# EAGLE board Lamp Logic Board_20 BRAIN (EAGLE 9.5.1)
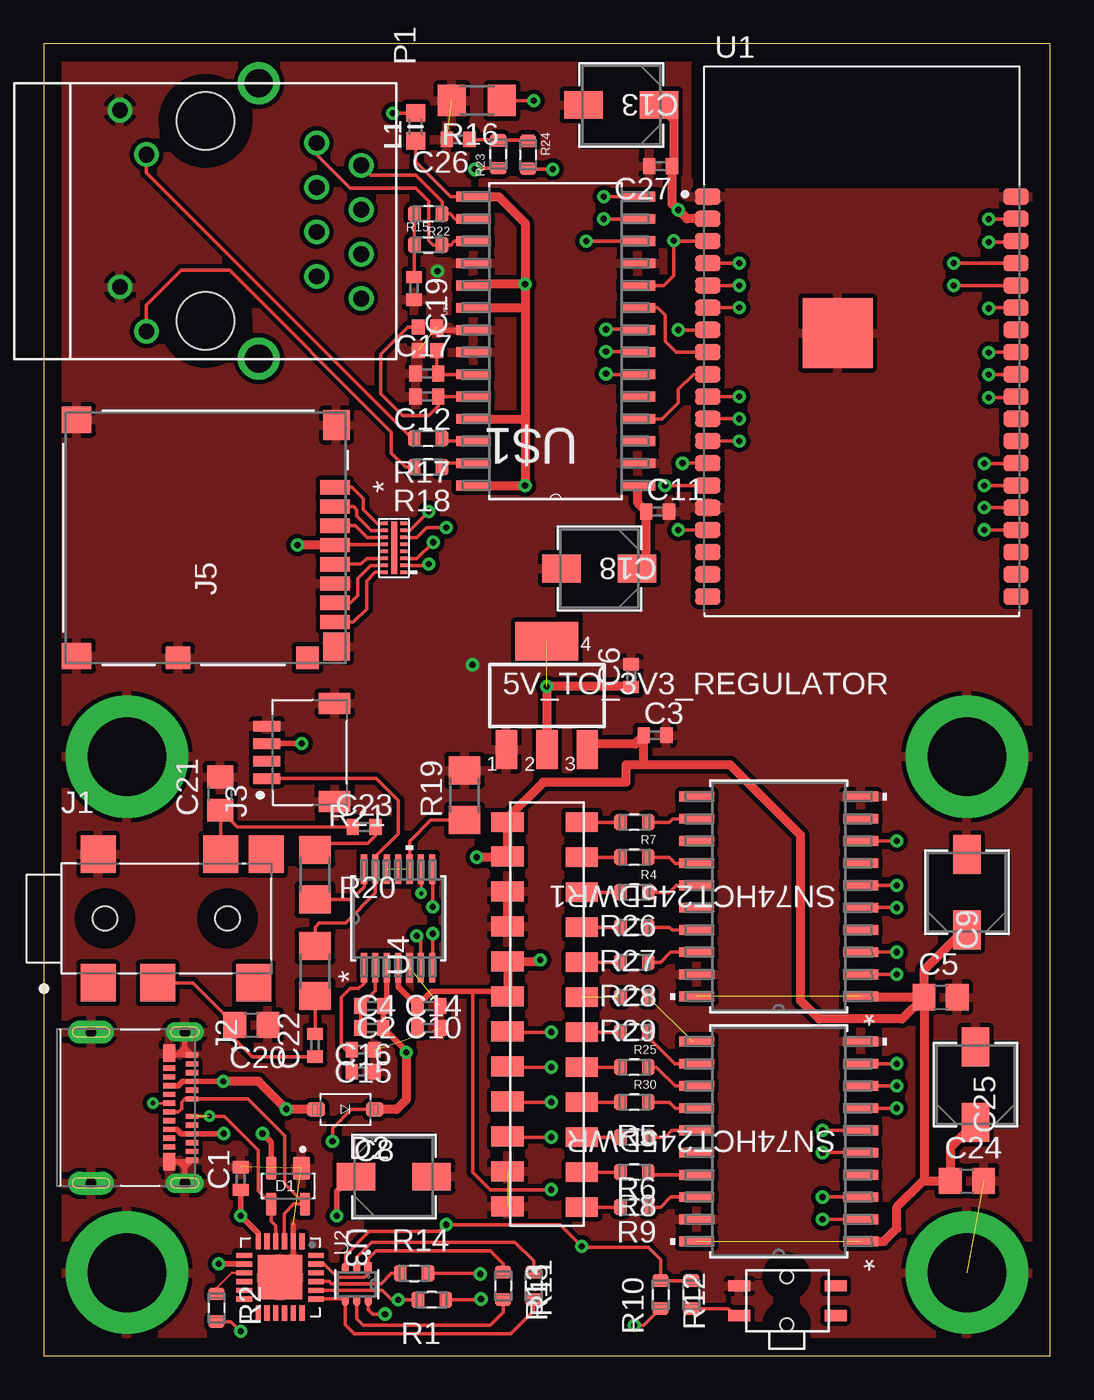
[diagram p0: board, top side]
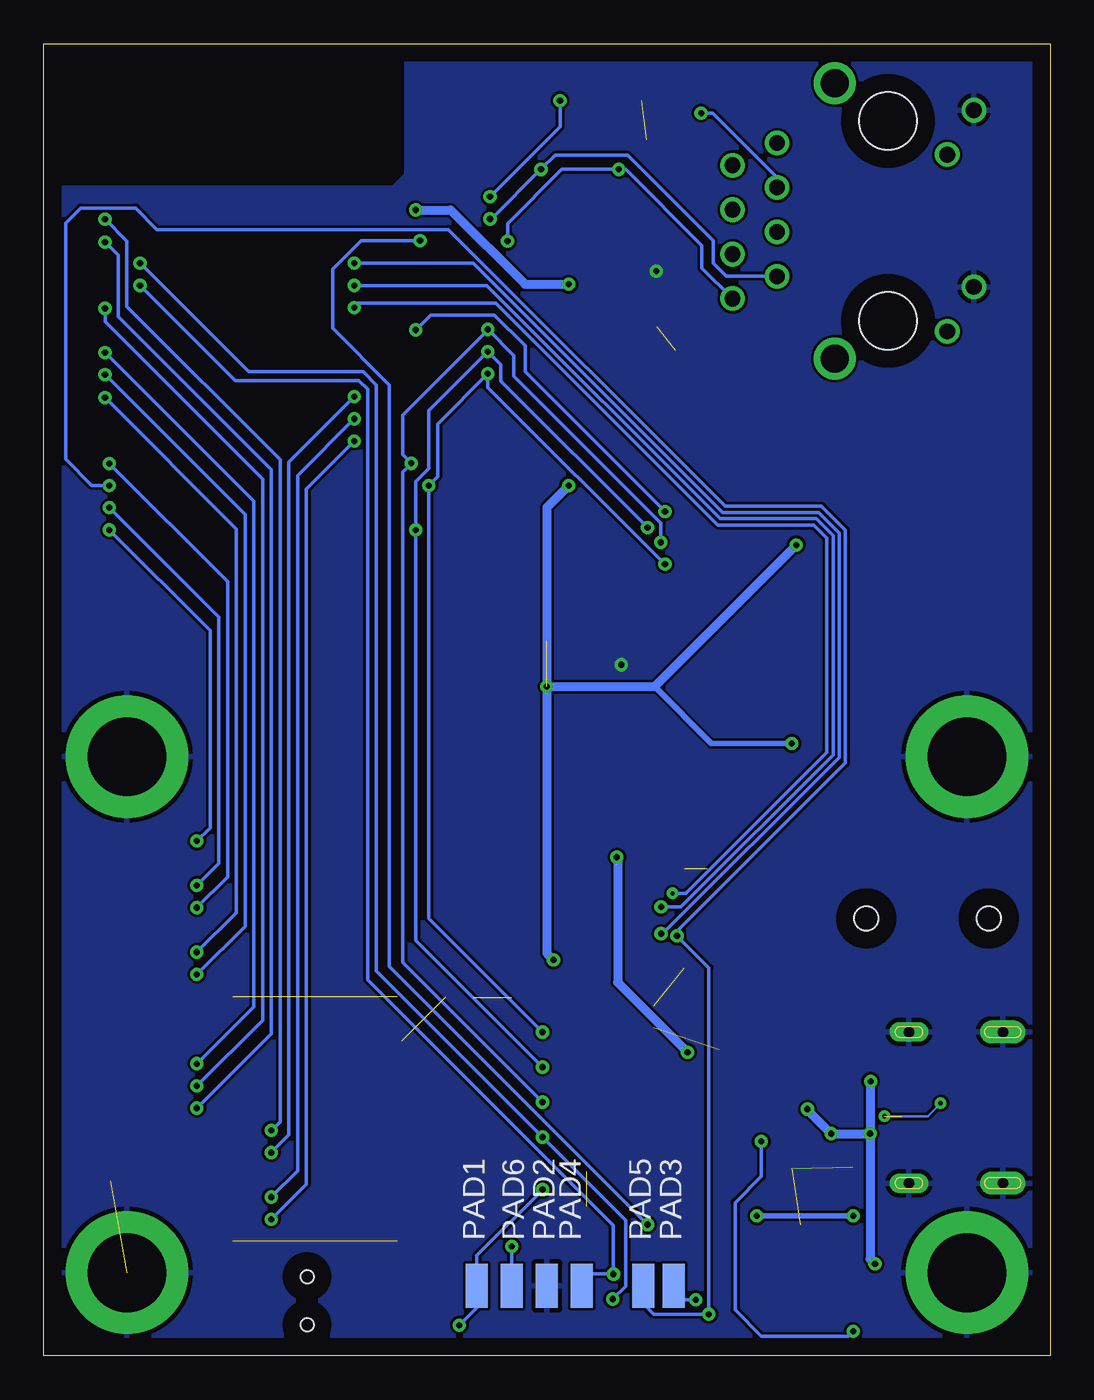
[diagram p1: board, bottom side, seen from below]

Size 57.5 x 75 mm. Coordinates in mm from the lower left corner, seen from the top.
Outline: 0,0 57.5,0 57.5,75 0,75 0,0
Copper layers (1*16): Top 0.035mm / dielectric 1.5mm / Bottom 0.035mm
Design rules "default": minimum track width 6mil, minimum drill 0.35mm, track to track 6mil, track to pad 6mil, pad to pad 6mil, via to via 6mil, smd to smd 6mil, copper to edge 40mil, drill to drill 6mil, minimum pad ring 10mil, minimum via ring 8mil, stop-mask expansion 4mil, vias tented up to drill 0mil, thermal gap 10mil

## Footprints (pad centres in the part's own frame; a part is rotated, then mirrored left to right if it is on the bottom)
SOT223 = smd 1.219 x 2.235: 1 -2.311,-3.099; 2 0,-3.099; 3 2.311,-3.099 | smd 3.6 x 2.2: 4 0,3.099
C0402 = smd 0.7 x 0.9: 1 -0.65,0; 2 0.65,0
C0805 = smd 1.3 x 1.5: 1 -0.95,0; 2 0.95,0
CAP_EEFC_B = smd 2.21 x 1.575: 1 -2.159,0; 2 2.159,0
SOT143 = smd 0.99 x 1.3: 1 -0.76,-1.025 | smd 0.59 x 1.3: 2 0.96,-1.025; 3 0.96,1.025; 4 -0.96,1.025
SOD-123 = smd 1.02 x 0.86: A 1.68,0; C -1.68,0
CUI_SJ2-35894D-SMT-TR = smd 2 x 2.15: 1 -3.9,-3.675; 2 3.1,3.675; 3 -0.5,-3.675; 4 -3.9,3.675; 10 5.7,3.675; 11 5,-3.675 | hole 1.4: -3.5,0; 3.5,0
MOLEX_105450-0101 = smd 0.3 x 0.7: A1 -3,3.77; A2 -2.5,3.77; A3 -2,3.77; A4 -1.5,3.77; A5 -1,3.77; A6 -0.5,3.77; A7 0.5,3.77; A8 1,3.77; A9 1.5,3.77; A10 2,3.77; A11 2.5,3.77; A12 3,3.77; B2 2.25,2.47; B3 1.75,2.47; B4 1.25,2.47; B5 0.75,2.47; B6 0.25,2.47; B7 -0.25,2.47; B8 -0.75,2.47; B9 -1.25,2.47; B10 -1.75,2.47; B11 -2.25,2.47 | smd 1 x 0.7: B1 3.1,2.47; B12 -3.1,2.47 | drill 0.6 pad 1.1 long: S1 -4.32,3.36; S2 4.32,3.36 | drill 0.6 pad 1.3 long: S3 -4.32,-2; S4 4.32,-2
JST_SM04B-SRSS-TB(LF)(SN) = smd 0.6 x 1.55: 1 -1.5,0; 2 -0.5,0; 3 0.5,0; 4 1.5,0 | smd 1.2 x 1.8: S1 -2.8,-3.875; S2 2.8,-3.875
CON00218_8 = smd 0.813 x 1.676: 1 2.899,-7.387; 2 1.799,-7.387; 3 0.699,-7.387; 4 -0.401,-7.387; 5 -1.501,-7.387; 6 -2.601,-7.387; 7 -3.701,-7.387; 8 -4.801,-7.387 | smd 1.499 x 1.702: 9 -6.751,7.374; 10 6.751,7.374 | smd 1.295 x 1.397: 11 -6.859,1.577 | smd 1.295 x 1.295: 12 -6.859,-5.823 | smd 1.6 x 1.499: 13 -6.201,-7.476 | smd 1.702 x 1.499: 14 6.449,-7.476
L0603 = smd 1 x 1.1: 1 -0.794,0; 2 0.794,0
WIZNET_RB1-125BAG1A = drill 0.9: L1 6.325,-3.38; L2 3.784,-4.899; L3 -3.786,-3.379; L4 -6.325,-4.9 | drill 0.9 pad 1.3: R1 -4.446,6.349; R2 -3.176,8.889; R3 -1.906,6.349; R4 -0.636,8.889; R5 0.634,6.349; R6 1.904,8.889; R7 3.174,6.349; R8 4.444,8.889 | drill 1.6 pad 2.184: S1 -7.876,3.049; S2 7.874,3.049 | hole 3.3: 5.714,-0.001; -5.716,-0.001
SMD1,27-2,54 = smd 1.27 x 2.54: 1 0,0
RES_0603 = smd 0.74 x 0.93: 1 -0.795,0; 2 0.795,0
R1206 = smd 1.6 x 1.803: 1 -1.422,0; 2 1.422,0
DW20 = smd 1.981 x 0.559: 1 -4.686,5.715; 2 -4.686,4.445; 3 -4.686,3.175; 4 -4.686,1.905; 5 -4.686,0.635; 6 -4.686,-0.635; 7 -4.686,-1.905; 8 -4.686,-3.175; 9 -4.686,-4.445; 10 -4.686,-5.715; 11 4.686,-5.715; 12 4.686,-4.445; 13 4.686,-3.175; 14 4.686,-1.905; 15 4.686,-0.635; 16 4.686,0.635; 17 4.686,1.905; 18 4.686,3.175; 19 4.686,4.445; 20 4.686,5.715
XCVR_ESP32-WROVER-I = smd 1.45 x 0.93: 1 -8.81,8.26; 2 -8.81,6.99; 3 -8.81,5.72; 4 -8.81,4.45; 5 -8.81,3.18; 6 -8.81,1.91; 7 -8.81,0.64; 8 -8.81,-0.63; 9 -8.81,-1.9; 10 -8.81,-3.17; 11 -8.81,-4.44; 12 -8.81,-5.71; 13 -8.81,-6.98; 14 -8.81,-8.25; 15 -8.81,-9.52; 16 -8.81,-10.79; 17 -8.81,-12.06; 18 -8.81,-13.33; 19 -8.81,-14.6; 20 8.81,-14.6; 21 8.81,-13.33; 22 8.81,-12.06; 23 8.81,-10.79; 24 8.81,-9.52; 25 8.81,-8.25; 26 8.81,-6.98; 27 8.81,-5.71; 28 8.81,-4.44; 29 8.81,-3.17; 30 8.81,-1.9; 31 8.81,-0.63; 32 8.81,0.64; 33 8.81,1.91; 34 8.81,3.18; 35 8.81,4.45; 36 8.81,5.72; 37 8.81,6.99; 38 8.81,8.26 | smd 4 x 4: 39 -1.38,0.47
SILABS_CP2102N-A02-GQFN24R = smd 0.9 x 0.3: 1 -1.55,1.75; 2 -1.55,1.25; 3 -1.55,0.75; 4 -1.55,0.25; 5 -1.55,-0.25; 6 -1.55,-0.75; 13 2.55,-0.75; 14 2.55,-0.25; 15 2.55,0.25; 16 2.55,0.75; 17 2.55,1.25; 18 2.55,1.75 | smd 0.3 x 0.9: 7 -0.75,-1.55; 8 -0.25,-1.55; 9 0.25,-1.55; 10 0.75,-1.55; 11 1.25,-1.55; 12 1.75,-1.55; 19 1.75,2.55; 20 1.25,2.55; 21 0.75,2.55; 22 0.25,2.55; 23 -0.25,2.55; 24 -0.75,2.55 | smd 2.55 x 2.55: 25 0.5,0.5
SOT-363 = smd 0.6 x 0.42: 1 -0.95,0.65; 2 -0.95,0; 3 -0.95,-0.65; 4 0.95,-0.65; 5 0.95,0; 6 0.95,0.65
PW14 = smd 1.676 x 0.356: 1 -2.819,1.95; 2 -2.819,1.3; 3 -2.819,0.65; 4 -2.819,0; 5 -2.819,-0.65; 6 -2.819,-1.3; 7 -2.819,-1.95; 8 2.819,-1.95; 9 2.819,-1.3; 10 2.819,-0.65; 11 2.819,0; 12 2.819,0.65; 13 2.819,1.3; 14 2.819,1.95
SOIC127P1034X264-28N = smd 1.981 x 0.559: 1 -4.699,8.255; 2 -4.699,6.985; 3 -4.699,5.715; 4 -4.699,4.445; 5 -4.699,3.175; 6 -4.699,1.905; 7 -4.699,0.635; 8 -4.699,-0.635; 9 -4.699,-1.905; 10 -4.699,-3.175; 11 -4.699,-4.445; 12 -4.699,-5.715; 13 -4.699,-6.985; 14 -4.699,-8.255; 15 4.699,-8.255; 16 4.699,-6.985; 17 4.699,-5.715; 18 4.699,-4.445; 19 4.699,-3.175; 20 4.699,-1.905; 21 4.699,-0.635; 22 4.699,0.635; 23 4.699,1.905; 24 4.699,3.175; 25 4.699,4.445; 26 4.699,5.715; 27 4.699,6.985; 28 4.699,8.255
CM1624-08DE = smd 0.2 x 0.4: CLK 1.075,1.3; CMD 2.275,1.3; DATA0 0.675,1.3; DATA1 0.3,1.3; DATA2 3.075,1.3; DATA3 2.675,1.3; ESD1 1.475,1.3; ESD2 1.475,0.175; ESD3 1.875,0.175; SDCLK 1.075,0.175; SDCMD 2.275,0.175; SDDATA0 0.675,0.175; SDDATA1 0.275,0.175; SDDATA2 3.075,0.175; SDDATA3 2.675,0.175; VCC 1.875,1.3 | smd 3 x 0.35: GND 1.7,0.725
ECS-250-10-37B-CTN-TR = smd 0.85 x 0.75: 1 0.45,0.4; 2 1.8,0.4; 3 1.8,1.45; 4 0.45,1.45
QUICKFIT_RISER_THING = drill 4.5 pad 7: P$1 0,0
TL1014BF160QG = smd 1.27 x 0.635: P$1 0,0; P$2 5.5,0; P$3 0,-1.7; P$4 5.5,-1.7 | hole 0.75: 2.7,0.525; 2.7,-2.225
MY_HEADER = smd 1.12 x 1.83: P$1 -2,0; P$2 0.005,0; P$3 2.005,0; P$4 4.005,0; P$5 6.005,0; P$6 8.005,0; P$7 10.005,0; P$8 12.005,0; P$9 14.005,0; P$10 16.005,0; P$11 18.005,0; P$12 20.005,0; P$13 -2,-4.25; P$14 -0.045,-4.25; P$15 1.955,-4.25; P$16 3.955,-4.25; P$17 5.955,-4.25; P$18 7.955,-4.25; P$19 9.955,-4.25; P$20 11.955,-4.25; P$21 13.955,-4.25; P$22 15.955,-4.25; P$23 17.955,-4.25; P$24 19.955,-4.25

## Placement (x,y rotation side)
5V_TO_3V3_REGULATOR  [SOT223]  28.75,37.75 0 top
C1  0.1uF  [C0402]  11.26,10.14 90 top
C2  1uF  [C0402]  18.75,18.75 0 top
C3  1uF  [C0402]  34.93,35.47 0 top
C4  0.1uF  [C0402]  18.75,20 0 top
C5  0.1uF  [C0805]  51.25,20.5 0 top
C6  1uF  [C0402]  33.56,38.88 90 top
C8  1uF  [CAP_EEFC_B]  20,10.25 0 top
C9  1uF  [CAP_EEFC_B]  52.75,26.5 90 top
C10  1uF  [C0402]  22,18.75 0 top
C11  10uF  [C0402]  35.08,48.26 0 top
C12  6pF  [C0402]  21.9,54.83 180 top
C13  100uF  [CAP_EEFC_B]  33,71.5 180 top
C14  0.1uF  [C0402]  22,20 0 top
C15  1uF  [C0402]  18.25,16.25 180 top
C16  0.1uF  [C0402]  18.25,17.5 180 top
C17  6pF  [C0402]  21.89,56.14 180 top
C18  100uF  [CAP_EEFC_B]  31.75,45 180 top
C19  0.1uF  [C0402]  21.16,61.01 270 top
C20  0.1uF  [C0805]  11.86,18.92 0 top
C21  0.1uF  [C0805]  10.09,32.14 90 top
C22  1uF  [C0402]  15.5,17.75 90 top
C23  1uF  [C0402]  18.3,30.22 0 top
C24  0.1uF  [C0805]  52.75,10 0 top
C25  1uF  [CAP_EEFC_B]  53.25,15.5 90 top
C26  0.1uF  [C0402]  23.68,69.53 180 top
C27  1uF  [C0402]  35.25,68 180 top
D1  SP0503BAHTG  [SOT143]  13.97,9.7 180 top
D2  MBR0520LT1G  [SOD-123]  17.24,14.08 180 top
J1  SJ2-35894D-SMT-TR  [CUI_SJ2-35894D-SMT-TR]  7,25 0 top
J2  105450-0101  [MOLEX_105450-0101]  4.7,14.19 270 top
J3  SM04B-SRSS-TB(LF)(SN)  [JST_SM04B-SRSS-TB(LF)(SN)]  12.75,34.5 90 top
J5  LLC  [CON00218_8]  9.25,46.75 90 top
L1  EXC3BP  [L0603]  21.25,70.25 90 top
P1  RB1-125BAG1A  [WIZNET_RB1-125BAG1A]  9.25,64.88 270 top
PAD1  VCC  [SMD1,27-2,54]  32.75,4 0 bottom
PAD2  GND  [SMD1,27-2,54]  28.75,4 0 bottom
PAD3  TX  [SMD1,27-2,54]  21.5,4 0 bottom
PAD4  RX  [SMD1,27-2,54]  26.75,4 0 bottom
PAD5  DTR  [SMD1,27-2,54]  23.25,4 0 bottom
PAD6  RTS  [SMD1,27-2,54]  30.75,4 0 bottom
R1  330  [RES_0603]  22.18,3.2 180 top
R2  12k  [RES_0603]  9.88,2.75 270 top
R4  330  [RES_0603]  33.75,28.5 180 top
R5  330  [RES_0603]  33.75,14.5 180 top
R6  330  [RES_0603]  33.75,12.5 180 top
R7  330  [RES_0603]  33.75,30.5 180 top
R8  330  [RES_0603]  33.75,10.5 180 top
R9  330  [RES_0603]  33.75,8.5 180 top
R10  330  [RES_0603]  37,3.5 270 top
R11  12k  [RES_0603]  28,4 270 top
R12  12k  [RES_0603]  35.25,3.5 270 top
R13  12k  [RES_0603]  26.25,4 270 top
R14  330  [RES_0603]  21.16,4.72 0 top
R15  330  [RES_0603]  21.97,63.5 0 top
R16  2.32k  [R1206]  24.75,71.75 180 top
R17  330  [RES_0603]  21.96,52.44 180 top
R18  330  [RES_0603]  21.97,50.8 180 top
R19  10k  [R1206]  24.04,32.05 90 top
R20  75  [R1206]  15.5,22 90 top
R21  75  [R1206]  15.5,27.5 270 top
R22  330  [RES_0603]  21.97,65.28 180 top
R23  330  [RES_0603]  25.98,68.68 90 top
R24  330  [RES_0603]  27.68,68.65 270 top
R25  330  [RES_0603]  33.75,18.5 180 top
R26  330  [RES_0603]  33.75,26.5 180 top
R27  330  [RES_0603]  33.75,24.5 180 top
R28  330  [RES_0603]  33.75,22.5 180 top
R29  330  [RES_0603]  33.75,20.5 180 top
R30  330  [RES_0603]  33.75,16.5 180 top
SN74HCT245DWR  SN74HCT245DWR  [DW20]  42,12.25 180 top
SN74HCT245DWR1  SN74HCT245DWR  [DW20]  42,26.25 180 top
U1  ESP32-WROVER-IB  [XCVR_ESP32-WROVER-I]  46.75,58 0 top
U2  CP2102N-A02-GQFN24R  [SILABS_CP2102N-A02-GQFN24R]  13,5 270 top
U3  MMDT3904-7-F  [SOT-363]  17.88,4.09 270 top
U4  PCM1808PWR  [PW14]  20.25,25 90 top
U$1  ENC28J60/SO  [SOIC127P1034X264-28N]  29.25,58 180 top
U$2  CM1624-08DE  [CM1624-08DE]  20.75,44.5 90 top
U$3  ECS-250-10-37B-CTN-TR  [ECS-250-10-37B-CTN-TR]  21,59.25 270 top
U$4  QUICKFIT_RISER_THING  [QUICKFIT_RISER_THING]  4.75,4.75 0 top
U$5  QUICKFIT_RISER_THING  [QUICKFIT_RISER_THING]  4.75,34.25 0 top
U$6  QUICKFIT_RISER_THING  [QUICKFIT_RISER_THING]  52.75,34.25 0 top
U$7  TL1014BF160QG  [TL1014BF160QG]  39.75,4 0 top
U$8  QUICKFIT_RISER_THING  [QUICKFIT_RISER_THING]  52.75,4.75 0 top
U$9  MY_HEADER  [MY_HEADER]  30.75,28.5 270 top

## Library data of the parts
5V_TO_3V3_REGULATOR = lm1117; MF: Texas Instruments; MPN: LM1117MP-1.8; OC_FARNELL: 1469053; OC_NEWARK: 41K3467
C1-C6 C10-C12 C14-C17 C19-C24 C26 C27 R16 R19-R21 = resistor
C8 C9 C13 C18 C25 = EEE-FC1V1R0R; MANUFACTURER_PART_NUMBER: EEEFC1V1R0R; VENDOR: Panasonic
D1 = SP0503BAHTG; DESCRIPTION: SP050xBA Series 8 V 30 pF Uni-Directional SMT TVS Avalanche Diode Array SOT-143; DIGI-KEY_PART_NUMBER: F2715CT-ND; DIGI-KEY_PURCHASE_URL: https://www.digikey.com/product-detail/en/littelfuse-inc/SP0503BAHTG/F2715CT-ND/1154322?utm_source=snapeda&utm_medium=aggregator&utm_campaign=symbol; MF: Littelfuse Inc.; MP: SP0503BAHTG; PACKAGE: SOT-143 Littelfuse
D2 = Diodes; CREATED_BY: PCBLayout.com; DIGIKEY_PART_NUMBER: MBR0520LT1GOSTR-ND; MANUFACTURER: ON Semiconductor; MPN: MBR0520LT1G; PACKAGE: SOD-123
J1 = SJ2-35894D-SMT-TR; CUI_PURCHASE_URL: https://www.cui.com/product/interconnect/connectors/audio-connectors/jacks/sj2-3589x-smt-series?utm_source=snapeda.com&utm_medium=referral&utm_campaign=snapedaBOM; DESCRIPTION: 3.5 mm, Stereo, Right Angle, Surface Mount _SMT_, Audio Jack Connector; DIGI-KEY_PART_NUMBER: CP-SJ2-35894D-SMT-CT-ND; DIGI-KEY_PURCHASE_URL: https://www.digikey.com/product-detail/en/cui-inc/SJ2-35894D-SMT-TR/CP-SJ2-35894D-SMT-CT-ND/6619623?utm_source=snapeda&utm_medium=aggregator&utm_campaign=symbol; MF: CUI Inc.; MP: SJ2-35894D-SMT-TR; PACKAGE: None
J2 = 105450-0101; DESCRIPTION: USB Shielded I/O Receptacle; Type C; Right Angle; Surface Mount; Gold over Nickel; DIGI-KEY_PART_NUMBER: WM12856CT-ND; DIGI-KEY_PURCHASE_URL: https://www.digikey.com/product-detail/en/molex/1054500101/WM12856CT-ND/5843891?utm_source=snapeda&utm_medium=aggregator&utm_campaign=symbol; MF: Molex; MP: 1054500101; PACKAGE: None
J3 = SM04B-SRSS-TB_LF__SN_; AVAILABILITY: Unavailable; DESCRIPTION: SH Series 1.0 mm Pitch 2 Position Single Row Side Entry Shrouded Header; MF: JST Sales; MP: SM04B-SRSS-TB_LF__SN_; PACKAGE: None; PRICE: None
J5 = 5027740891; MANUFACTURER_PART_NUMBER: LLC; VENDOR: Molex Connector Corporation
L1 = ferrite
P1 = RB1-125BAG1A; AVAILABILITY: Unavailable; DESCRIPTION: Accessory RJ-45 With Transformer Connector - UDE; MF: WIZnet; MP: RB1-125BAG1A; PACKAGE: HVQFN-36 NXP Semiconductors; PRICE: None
PAD1-PAD6 = wirepad
R1 R2 R4-R15 R17 R18 R22-R30 = Resistor_Capacitor; CREATED_BY: PCBLayout.com; DIGIKEY_PART_NUMBER: 311-0.0GRTR-ND; MANUFACTURER: Yageo; MPN: RC0603JR-070RL; PACKAGE: SMD 0603
SN74HCT245DWR SN74HCT245DWR1 = SN74HCT245DWR ; MANUFACTURER_PART_NUMBER: SN74HCT245DWR; VENDOR: Texas Instruments
U1 = ESP32-WROVER-I; AVAILABILITY: Unavailable; DESCRIPTION: Module: combo; GPIO, I2C x2, I2S x2, SDIO, SPI x3, UART x3; U.FL; MF: Espressif Systems; MP: ESP32-WROVER-I; PACKAGE: Module Espressif Systems; PRICE: None
U2 = CP2102N-A02-GQFN20R
U3 = MMDT3904; MANUFACTURER_PART_NUMBER: MMDT39047F; VENDOR: Diodes Inc
U4 = PCM1808PWR; MANUFACTURER_PART_NUMBER: PCM1808PWR; VENDOR: Texas Instruments
U$1 = ENC28J60_SO; DESCRIPTION: ENC28J60 Series 3.3 V Stand-Alone Ethernet Controller with SPI Interface-SSOP-28; DIGI-KEY_PART_NUMBER: ENC28J60/SS-ND; DIGI-KEY_PURCHASE_URL: https://www.digikey.com/product-detail/en/microchip-technology/ENC28J60-SS/ENC28J60-SS-ND/857584?utm_source=snapeda&utm_medium=aggregator&utm_campaign=symbol; MF: Microchip; MP: ENC28J60/SS; PACKAGE: SSOP-28 Microchip
U$2 = CM1624-08DE
U$3 = ECS-250-10-37B-CTN-TR
U$4-U$6 U$8 = QUICKFIT_RISER_THING
U$7 = TL1014BF160QG
U$9 = MY_HEADER

## Nets
BCK: U1.5 U4.8
CT: L1.2 P1.R3
D+: D1.4 J2.A6 J2.B6 U2.3
D-: D1.3 J2.A7 J2.B7 U2.4
DOUT: U1.6 U4.9
DTR: R13.1 U2.23 U3.1
EN: PAD6.1 R10.1 R12.1 U1.3 U3.3 U$1.10
ETHER_CS: U1.8 U$1.9
ETHER_INT: U1.9 U$1.4
GND: 5V_TO_3V3_REGULATOR.1 C1.2 C3.2 C5.2 C6.2 C8.2 C9.2 C10.2 C11.2 C12.2 C13.2 C14.2 C15.1 C16.1 C17.2 C18.2 C19.2 C20.2 C21.2 C24.2 C25.2 C26.2 C27.2 D1.1 J1.4 J2.A1 J2.A12 J2.B1 J2.B12 J2.S1 J2.S2 J2.S3 J2.S4 J3.4 J3.S1 J3.S2 J5.6 J5.9 J5.10 J5.11 J5.13 J5.14 P1.L2 P1.L4 PAD2.1 R16.2 R19.2 SN74HCT245DWR1.10 SN74HCT245DWR1.19 SN74HCT245DWR.10 SN74HCT245DWR.19 U1.1 U1.15 U1.38 U1.39 U2.2 U2.25 U4.5 U$1.2 U$1.11 U$1.18 U$1.21 U$1.22 U$3.2 U$3.4 U$4.P$1 U$5.P$1 U$6.P$1 U$7.P$1 U$8.P$1 U$9.P$15 U$9.P$16 U$9.P$23 U$9.P$24
HEADER_CS: R1.1 U1.35 U$9.P$22
LEDA: P1.L1 R18.2
LEDB: P1.L3 R17.2
LEDS1_3V3 [LED Data]: SN74HCT245DWR1.8 U1.23
LEDS1_5V: R7.2 U$9.P$1
LEDS2_3V3 [LED Data]: SN74HCT245DWR1.6 U1.24
LEDS2_5V [LED Data]: R4.2 U$9.P$2
LEDS3_3V3 [LED Data]: SN74HCT245DWR1.5 U1.26
LEDS3_5V [LED Data]: R26.2 U$9.P$3
LEDS4_3V3 [LED Data]: SN74HCT245DWR1.3 U1.29
LEDS4_5V [LED Data]: R27.2 U$9.P$4
LEDS5_3V3 [LED Data]: SN74HCT245DWR1.2 U1.30
LEDS5_5V [LED Data]: R28.2 U$9.P$5
LEDS6_3V3 [LED Data]: SN74HCT245DWR.9 U1.31
LEDS6_5V [LED Data]: R29.2 U$9.P$6
LEDS7_3V3 [LED Data]: SN74HCT245DWR.8 U1.33
LEDS7_5V [LED Data]: R25.2 U$9.P$7
LEDS8_3V3 [LED Data]: SN74HCT245DWR.7 U1.36
LEDS8_5V [LED Data]: R30.2 U$9.P$8
LEDS9_3V3 [LED Data]: SN74HCT245DWR.6 U1.37
LEDS9_5V [LED Data]: R5.2 U$9.P$9
LEDS10_3V3 [LED Data]: SN74HCT245DWR.5 U1.10
LEDS10_5V [LED Data]: R6.2 U$9.P$10
LEDS11_3V3 [LED Data]: SN74HCT245DWR.3 U1.11
LEDS11_5V [LED Data]: R8.2 U$9.P$11
LEDS12_3V3 [LED Data]: SN74HCT245DWR.2 U1.12
LEDS12_5V [LED Data]: R9.2 U$9.P$12
LEFT_CHANNEL: R21.2 U4.14
LRCK: U1.4 U4.7
MIC: J1.1
MISO: U1.14 U$1.6 U$2.SDDATA0 U$9.P$19
MOSI: U1.16 U$1.7 U$2.SDCMD U$9.P$20
N$1: R9.1 SN74HCT245DWR.18
N$2: C2.1 C4.1 U4.2
N$3: C20.1 C22.1 J1.3
N$4: C21.1 C23.1 J1.2
N$5: C1.1 C8.1 U2.6
N$6: R7.1 SN74HCT245DWR1.12
N$7: R11.1 U3.2
N$8: R13.2 U3.5
N$9: R10.2 U$7.P$3
N$10: R28.1 SN74HCT245DWR1.18
N$11: R6.1 SN74HCT245DWR.15
N$12: R5.1 SN74HCT245DWR.14
N$13: R27.1 SN74HCT245DWR1.17
N$14: R8.1 SN74HCT245DWR.17
N$15: R26.1 SN74HCT245DWR1.15
N$16: C22.2 R20.1
N$17: C15.2 C16.2 U4.1
N$18: R14.1 U2.21
N$19: C11.1 C18.1 U$1.1
N$20: R16.1 U$1.14
N$21: C12.1 U$1.24 U$3.1
N$22: C17.1 U$1.23 U$3.3
N$23: R17.1 U$1.26
N$24: C23.2 R21.1
N$25: R18.1 U$1.27
N$26: R29.1 SN74HCT245DWR.11
N$27: R4.1 SN74HCT245DWR1.14
N$28: R2.1 U2.9
N$30: R19.1 U4.10 U4.11 U4.12
N$31: C26.1 R23.2 R24.1
N$32: C19.1 R15.1 R22.2
N$34: R30.1 SN74HCT245DWR.13
N$35: R25.1 SN74HCT245DWR.12
RIGHT_CHANNEL: J3.1 R20.2 U4.13
RIGHT_GAIN: J3.2
RTS: R11.2 U2.19 U3.4
RX0: PAD4.1 R14.2 U1.34
SCK: U1.13 U$1.8 U$2.SDCLK U$9.P$21
SCKI: PAD5.1 U1.25 U3.6 U4.6
SD_CMD: J5.3 U$2.CMD
SD_CS: U1.7 U$2.SDDATA3
SD_D0: J5.7 U$2.DATA0
SD_D1: J5.8 U$2.DATA1
SD_D2: J5.1 U$2.DATA2
SD_D3: J5.2 U$2.DATA3
SD_SCK: J5.5 U$2.CLK
TPIN+: P1.R7 R24.2 U$1.13
TPIN-: P1.R8 R23.1 U$1.12
TPOUT+: P1.R1 R15.2 U$1.17
TPOUT-: P1.R2 R22.1 U$1.16
TX_CONTROLLER: PAD3.1 R1.2 U2.20
VDD3V3: 5V_TO_3V3_REGULATOR.2 5V_TO_3V3_REGULATOR.4 C6.1 C10.1 C13.1 C14.1 C27.1 J3.3 J5.4 L1.1 PAD1.1 R12.2 U1.2 U4.4 U$1.15 U$1.19 U$1.20 U$1.25 U$1.28 U$2.VCC U$9.P$17 U$9.P$18
VDD5V: 5V_TO_3V3_REGULATOR.3 C2.2 C3.1 C4.2 C5.1 C9.1 C24.1 C25.1 D2.C R2.2 SN74HCT245DWR1.1 SN74HCT245DWR1.20 SN74HCT245DWR.1 SN74HCT245DWR.20 U4.3 U$9.P$13 U$9.P$14
VDD5VUSB: D1.2 D2.A J2.A4 J2.A9 J2.B4 J2.B9 U2.8
VREGIN: U2.7

## Tracks (layer width: path | path; a pad name or v marks a point on that pad's centre or on a via)
BCK  (via drill 0.35)
  Top 0.2: U1.5 v39.75,61.18 | v22.23,25.65 22.23,27.79 U4.8
  Bottom 0.2: v39.75,61.18 32.18,61.18 18.85,47.85 13.35,47.85 12.4,46.9 12.4,34.35 21.1,25.65 v22.23,25.65
CT  (via drill 0.35 pad 0.4)
  Top 0.2: L1.2 v19.94,71.03
  Bottom 0.2: P1.R3 15.6,67.35 19.28,71.03 v19.94,71.03
D+
  Top 0.2: U2.3 13.75,8.13 14.3,8.68 D1.4 13.78,9.82 13.78,12.57 11.67,14.69 J2.A6 8.06,14.69 7.87,14.5 7.87,14.12 7.69,13.94 J2.B6
D-  (via drill 0.25)  (1 unrouted)
  Top 0.152: J2.B7 v6.25,14.44
  Top 0.2: U2.4 13.25,7.43 13.01,7.68 D1.3 12.26,9.43 12.26,11.74 10.31,13.69 J2.A7
  Bottom 0.152: v6.25,14.44 7,13.69 v9.46,13.69 v9.46,13.7
DOUT  (via drill 0.25, 0.35)
  Top 0.2: U1.6 v39.75,59.91 | v21.57,26.43 21.57,27.8 U4.9
  Bottom 0.2: v39.75,59.91 39.5,60.16 31.66,60.16 19,47.5 13.5,47.5 12.75,46.75 12.75,34.5 20.82,26.43 v21.57,26.43
DTR
  Top 0.2: 16.25,5 | U2.23 16.01,5.25 16.25,5 | 16.25,5 16.77,4.48 18.32,4.48 18.53,4.69 U3.1 18.53,5.54 19,6 25.5,6 26.25,5.25 R13.1
EN  (via drill 0.35, 0.35 pad 0.4)
  Top 0.2: U$1.10 35.42,61.17 36,61.75 v36,63.75 36.03,63.72 U1.3 | U3.3 17.25,5.05 17.25,5.75 18.6,7.1 22.6,7.1 v23,7.5 29.5,7.5 v30.75,6.25 30.79,6.21 34.53,6.21 35.25,5.49 R12.1 R10.1
  Bottom 0.2: v23,7.5 37.75,22.25 37.75,55.5 41,58.75 41,62.11 39.36,63.75 v36,63.75 | PAD6.1 v30.75,6.25
ETHER_CS
  Top 0.2: U$1.9 35.09,59.91 35.5,59.5 35.5,58 36.13,57.37 U1.8
ETHER_INT
  Top 0.2: U$1.4 35.3,53.55 36.25,54.5 36.25,55.25 37.1,56.1 U1.9
GND  (via drill 0.35 pad 0.4)  (8 unrouted)
  Top 0.305: U$1.21 22.61,58.63 U$3.4 | 8.06,10.78 J2.A12 8.37,11.09 J2.B1 7.75,11.09 8.06,10.78 | 8.06,10.78 J2.S2 | 8,17.19 J2.A1 8.06,17.6 | 8,17.19 7.75,17.19 | 7.75,17.19 7.27,17.19 J2.B12 | 8.06,17.6 J2.S1 | 8,17.54 7.75,17.29 7.75,17.19 | 8.06,17.6 8,17.54 | 8,17.54 8,17.19 | U2.25 14.25,5.25 U2.2 14.25,7.5
  Top 0.508: U$9.P$16 U$9.P$15
  other vias: 24.5,39.5 22.5,62
  pour Top (isolate 0.254): 0,75.25 36.75,75.25 36.75,67.25 37.5,66.5 59.5,66.5 59.5,-1.75 0,-1.75
  pour Bottom: 36.25,75 36,75.25 0,75.25 0,-3.25 60,-3.25 60,66.75 37.5,66.75 36.75,67.5 36.75,75
HEADER_CS  (via drill 0.35 pad 0.4)
  Top 0.2: U1.35 v52,62.45 | v29,12.5 26.56,12.5 U$9.P$22 | v24.98,3.25 24.94,3.2 R1.1
  Bottom 0.2: v52,62.45 45.8,56.25 39.25,56.25 38.5,55.5 38.5,22 v29,12.5 24.25,7.75 24.25,3.98 v24.98,3.25
LEDA
  Top 0.2: R18.2 20.67,50.8 19.87,51.61 19.87,52.8 10.62,62.05 7.87,62.05 5.87,60.05 P1.L1
LEDB
  Top 0.2: R17.2 21.06,52.44 5.87,67.63 P1.L3
LEDS1_3V3  (via drill 0.35 pad 0.4)
  Top 0.2: U1.23 v53.75,47.21 | SN74HCT245DWR1.8 v48.75,29.43
  Bottom 0.2: v53.75,47.21 48,41.46 48,30.18 v48.75,29.43
LEDS1_5V
  Top 0.2: U$9.P$1 R7.2
LEDS2_3V3  (via drill 0.35 pad 0.4)
  Top 0.2: U1.24 v53.75,48.48 | SN74HCT245DWR1.6 v48.75,26.89
  Bottom 0.2: v53.75,48.48 47.5,42.23 47.5,28.14 v48.75,26.89
LEDS2_5V
  Top 0.2: R4.2 U$9.P$2
LEDS3_3V3  (via drill 0.35 pad 0.4)
  Top 0.2: SN74HCT245DWR1.5 v48.75,25.61 | v53.75,51 55.54,51 U1.26
  Bottom 0.2: v53.75,51 47,44.25 47,27.36 v48.75,25.61
LEDS3_5V
  Top 0.2: R26.2 U$9.P$3
LEDS4_3V3  (via drill 0.35 pad 0.4)
  Top 0.2: SN74HCT245DWR1.3 v48.75,23.07 | v54,54.77 55.5,54.77 U1.29
  Bottom 0.2: v54,54.77 46.5,47.27 46.5,25.32 v48.75,23.07
LEDS4_5V
  Top 0.2: R27.2 U$9.P$4
LEDS5_3V3  (via drill 0.35 pad 0.4)
  Top 0.2: SN74HCT245DWR1.2 v48.75,21.8 | v54,56.08 55.54,56.08 U1.30
  Bottom 0.2: v54,56.08 46,48.08 46,24.55 v48.75,21.8
LEDS5_5V
  Top 0.2: R28.2 U$9.P$5
LEDS6_3V3  (via drill 0.35 pad 0.4)
  Top 0.2: 46.63,16.64 SN74HCT245DWR.9 v48.75,16.7 | U1.31 54.02,57.37 v54,57.35
  Bottom 0.2: v54,57.35 45.5,48.85 45.5,19.95 v48.75,16.7
LEDS6_5V  (1 unrouted)
LEDS7_3V3  (via drill 0.35 pad 0.4)
  Top 0.2: 46.62,15.49 SN74HCT245DWR.8 v48.75,15.43 | v54,59.87 54.04,59.91 U1.33
  Bottom 0.2: v54,59.87 54,59.12 45,50.12 45,19.18 v48.75,15.43
LEDS7_5V
  Top 0.2: R25.2 U$9.P$7
LEDS8_3V3  (via drill 0.35 pad 0.4)
  Top 0.2: 46.63,14.1 SN74HCT245DWR.7 v48.75,14.15 | v54,63.66 55.5,63.66 U1.36
  Bottom 0.2: v54,63.66 53.25,62.91 53.25,59.41 44.5,50.66 44.5,18.41 v48.75,14.15
LEDS8_5V
  Top 0.2: R30.2 U$9.P$8
LEDS9_3V3  (via drill 0.35 pad 0.4)
  Top 0.2: SN74HCT245DWR.6 v44.5,12.88 | v54,64.97 55.54,64.97 U1.37
  Bottom 0.2: v54,64.97 52.75,63.72 52.75,59.97 44,51.22 44,13.38 v44.5,12.88
LEDS9_5V
  Top 0.2: R5.2 U$9.P$9
LEDS10_3V3  (via drill 0.35 pad 0.4)
  Top 0.2: SN74HCT245DWR.5 v44.5,11.62 | U1.10 v39.75,54.83
  Bottom 0.2: v39.75,54.83 43.5,51.08 43.5,12.62 v44.5,11.62
LEDS10_5V
  Top 0.2: R6.2 U$9.P$10
LEDS11_3V3  (via drill 0.35 pad 0.4)
  Top 0.2: SN74HCT245DWR.3 v44.5,9.07 | U1.11 v39.75,53.56
  Bottom 0.2: v39.75,53.56 43,50.31 43,10.57 v44.5,9.07
LEDS11_5V
  Top 0.2: U$9.P$11 R8.2
LEDS12_3V3  (via drill 0.35 pad 0.4)
  Top 0.2: SN74HCT245DWR.2 v44.5,7.8 | U1.12 v39.75,52.29
  Bottom 0.2: v44.5,7.8 42.5,9.8 42.5,49.54 v39.75,52.29
LEDS12_5V
  Top 0.2: R9.2 U$9.P$12
LEFT_CHANNEL
  Top 0.2: R21.2 17.58,26.08 18.3,26.8 U4.14
LRCK  (via drill 0.35)
  Top 0.2: U1.4 v39.75,62.45 | v22.23,24.13 22.23,22.21 U4.7
  Bottom 0.2: v39.75,62.45 32.95,62.45 18.71,48.2 13.21,48.2 12.04,47.04 12.04,34.21 22.12,24.13 v22.23,24.13
MISO  (via drill 0.35 pad 0.4)
  Top 0.2: U1.14 v35.5,49.75 | 33.91,56.13 U$1.6 32.17,56.09 v32.13,56.13 | U$2.SDDATA0 21.93,45.17 v22,45.25 | v29,18.5 26.56,18.5 U$9.P$19
  Bottom 0.2: v29,18.5 35.5,25 v35.5,49.75 35,50.25 35,53.27 v32.13,56.13 32.13,55.36 22,45.23 v22,45.25
MOSI  (via drill 0.35 pad 0.4)
  Top 0.2: U1.16 v36.25,47.21 | v32.13,57.4 33.91,57.4 U$1.7 | U$2.SDCMD 21.32,46.77 21.89,47.34 v23,47.34 | v29,16.5 26.56,16.5 U$9.P$20
  Bottom 0.2: v23,47.34 31.38,55.72 31.38,56.65 v32.13,57.4 35.5,54.03 35.5,50.71 36.25,49.96 v36.25,47.21 36.25,23.75 v29,16.5
N$1
  Top 0.2: SN74HCT245DWR.18 35.83,9.07 35.25,8.5 R9.1
N$2
  Top 0.2: C2.1 C4.1 18.95,20.85 U4.2
N$3
  Top 0.2: C22.1 11.9,17.1 10.91,18.09 C20.1 8.5,21.32 J1.3
N$4
  Top 0.2: 17.4,30.47 C23.1 11.05,30.22 C21.1 10.1,31.18 J1.2
N$5  (via drill 0.35 pad 0.4)
  Top 0.305: C1.1 v11.26,8.01 v11.25,8 12.25,7 U2.6 | v16.75,8 16.75,9.4 17.59,10.25 C8.1
  Bottom 0.305: v11.25,8 v16.75,8
N$6
  Top 0.2: SN74HCT245DWR1.12 35.95,30.7 35.75,30.5 R7.1
N$7
  Top 0.2: U3.2 17.88,5.63 18.75,6.5 26.92,6.5 28,5.42 R11.1
N$8
  Top 0.2: U3.5 17.88,2.12 18.25,1.75 25.5,1.75 26.25,2.5 R13.2
N$9
  Top 0.2: U$7.P$3 39.5,2.3 39.12,2.68 37,2.68 R10.2
N$10
  Top 0.2: SN74HCT245DWR1.18 35.83,23.07 35.25,22.5 R28.1
N$11
  Top 0.2: SN74HCT245DWR.15 35.88,12.88 35.5,12.5 R6.1
N$12
  Top 0.2: SN74HCT245DWR.14 36.09,14.15 35.75,14.5 R5.1
N$13
  Top 0.2: SN74HCT245DWR1.17 35.91,24.34 35.75,24.5 R27.1
N$14
  Top 0.2: SN74HCT245DWR.17 34.7,10.35 R8.1
N$15
  Top 0.2: SN74HCT245DWR1.15 36.13,26.89 35.75,26.5 R26.1
N$16
  Top 0.2: C22.2 R20.1
N$17
  Top 0.2: C15.2 C16.2 17.25,17.5 17,17.75 17,20.5 17.5,21 18,21 18.3,21.3 U4.1
N$18
  Top 0.2: U2.21 16.3,4.25 16.42,4.13 19.28,4.13 19.87,4.72 R14.1
N$19
  Top 0.508: U$1.1 33.95,48.74 C11.1 34.43,45.52 C18.1
N$20  (via drill 0.35 pad 0.4)
  Top 0.2: U$1.14 v32,66.25 | v28,71.75 R16.1
  Bottom 0.2: v32,66.25 28,70.25 v28,71.75
N$21
  Top 0.2: U$1.24 C12.1 22.55,54.3 22,53.75 20.5,53.75 19.25,55 19.25,57.25 20.8,58.8 U$3.1
N$22
  Top 0.2: U$1.23 22.59,56.09 C17.1 22.45,56.24 U$3.3
N$23
  Top 0.2: U$1.26 22.91,52.28 R17.1
N$24
  Top 0.2: C23.2 18.95,29.72 18.53,29.3 15.88,29.3 R21.1
N$25
  Top 0.2: U$1.27 22.98,51.02 R18.1
N$26  (1 unrouted)
  Top 0.2: SN74HCT245DWR.11 37.08,17.96
N$27
  Top 0.2: SN74HCT245DWR1.14 36.09,28.16 35.75,28.5 R4.1
N$28
  Top 0.152: U2.9 10.75,4.75 9.88,3.88 R2.1
N$30  (2 unrouted)
  Top 0.2: U4.10 20.9,28.75 20.9,28.77 20.9,29.4 22.12,30.62 R19.1
N$31
  Top 0.2: C26.1 25.92,69.53 R23.2 27.64,69.47 R24.1
N$32
  Top 0.2: C19.1 21.16,63.48 R15.1 R22.2
N$34
  Top 0.2: SN74HCT245DWR.13 36.08,15.43 35,16.5 R30.1
N$35
  Top 0.2: SN74HCT245DWR.12 36.05,16.7 34.55,18.2 R25.1
RIGHT_CHANNEL
  Top 0.2: R20.2 15.5,24.5 15.75,24.75 17.25,24.75 18.95,26.45 U4.13 18.95,28.54 20.25,29.84 20.25,31.75 19,33 J3.1
RTS
  Top 0.2: U2.19 17.12,3.25 U3.4 17.23,1.77 17.75,1.25 26.67,1.25 28,2.58 R11.2
RX0  (via drill 0.35 pad 0.4)
  Top 0.2: U1.34 v52,61.18 | v24.95,4.67 24.91,4.72 R14.2
  Bottom 0.2: v52,61.18 46.57,55.75 39.5,55.75 39,55.25 39,21.5 24.95,7.45 v24.95,4.67 26.75,4.67 PAD4.1
SCK  (via drill 0.35 pad 0.4)
  Top 0.2: U1.13 v36.5,51.02 | v32.13,58.67 33.91,58.67 U$1.8 | U$2.SDCLK 21.32,45.58 v22.25,46.5 | v29,14.5 26.56,14.5 U$9.P$21
  Bottom 0.2: v29,14.5 37,22.5 37,50.52 v36.5,51.02 37,51.52 37,53.77 32.13,58.64 v32.13,58.67 30.63,57.17 30.63,55.99 22.25,47.61 v22.25,46.5
SCKI  (via drill 0.35)
  Top 0.2: U4.6 21.55,23.77 v21.32,24 | U3.6 18.53,2.64 18.79,2.38 v19.5,2.38 | U1.25 v53.75,49.75
  Bottom 0.2: 23,3.75 PAD5.1 23.25,3 22.63,2.38 v19.5,2.38 19.5,22.18 v21.32,24 21.32,24.25 11.69,33.87 11.69,47.19 13.06,48.56 18.56,48.56 34.38,64.38 51.03,64.38 52.25,65.6 | v53.75,49.75 54.75,49.75 56.25,51.25 56.25,64.75 55.4,65.6 52.25,65.6 | 52.25,65.6 52.24,65.6
SD_CMD
  Top 0.2: U$2.CMD 18.48,46.77 17.8,47.45 J5.3
SD_CS  (via drill 0.35 pad 0.4)
  Top 0.2: U$2.SDDATA3 20.93,47.17 v22,48.25 | U1.7 v36.25,58.64
  Bottom 0.2: v36.25,58.64 35.39,59.5 31.75,59.5 30,57.75 30,56.25 v22,48.25
SD_D0
  Top 0.2: U$2.DATA0 18.7,45.17 17.95,44.43 17.95,43.45 17.55,43.05 J5.7
SD_D1
  Top 0.2: U$2.DATA1 18.95,44.8 18.45,44.3 18.45,42.7 17.7,41.95 J5.8
SD_D2
  Top 0.2: U$2.DATA2 19.05,47.58 18.25,48.37 18.25,49 17.6,49.65 J5.1
SD_D3
  Top 0.2: U$2.DATA3 18.71,47.17 17.9,47.99 17.9,48.35 17.7,48.55 J5.2
SD_SCK
  Top 0.2: U$2.CLK 18.45,45.58 18.12,45.25 J5.5
TPIN+  (via drill 0.35 pad 0.4)
  Top 0.2: 29.05,67.85 v29.09,67.82 27.71,67.82 R24.2 | U$1.13 v32,64.98
  Bottom 0.2: P1.R7 18.5,61.7 19.25,62.45 19.25,63.75 24.12,68.62 28.28,68.62 v29.09,67.82 31.92,64.98 v32,64.98
TPIN-  (via drill 0.35 pad 0.4)
  Top 0.2: v24.64,67.82 24.7,67.88 R23.1 | U$1.12 v31,63.72
  Bottom 0.2: P1.R8 19.89,62.18 19.89,63.45 24.25,67.82 v24.64,67.82 27.89,67.82 31,64.71 v31,63.72
TPOUT+
  Top 0.2: U$1.17 23.46,63.72 23.25,63.5 R15.2 22.25,63.5 22,63.75 22,66 21.25,66.75 17.5,66.75 15.6,68.65 P1.R1
TPOUT-
  Top 0.2: U$1.16 23.52,64.98 23.22,65.28 R22.1 22.77,65.98 21.25,67.5 18.69,67.5 P1.R2
TX_CONTROLLER  (via drill 0.35)
  Top 0.2: R1.2 v20.25,3.2 19.88,3.2 19.33,3.75 U2.20
  Bottom 0.2: v20.25,3.2 21.8,3.2 21.62,3.38 21.62,3.88 PAD3.1
VDD3V3  (via drill 0.35, 0.35 pad 0.4)  (1 unrouted)
  Top 0.2: J5.4 16.64,46.38 U$2.VCC | U$1.15 23.25,66.25 21.25,68.25 L1.1 | R12.2 34.3,1.75 34.3,1.74 33.77,1.74 v33.75,1.75 | v29,9.5 25.5,9.5 24.5,10.5 24.5,20.83
  Top 0.305: C14.1 22.18,20.83 24.5,20.83 26.65,20.83 U$9.P$18 | C10.1 C14.1 | C14.1 20.25,21.1 U4.4 | J3.3 v14.75,35
  Top 0.508: 5V_TO_3V3_REGULATOR.2 v28.75,38.25 33.55,38.25 C6.1 | U1.2 36.76,64.99 v36.25,65.5 35.9,65.85 C27.1 36,68.1 36,70.66 C13.1 35.78,70.88 | U$9.P$18 U$9.P$17 28.29,22.55 v28.37,22.63 | J5.4 v14.5,46.35 | U$1.19 24.63,61.25 v27.5,61.25 | v27.5,61.25 27.5,60 | 27.5,60 27.5,53.5 | 27.5,53.5 v27.5,49.75 U$1.28 | U$1.15 26,66.25 27.5,64.75 v27.5,61.25 | U$1.20 27.41,59.91 27.5,60 | U$1.25 27.45,53.55 27.5,53.5
  Bottom 0.2: v33.75,1.75 32.75,2.75 PAD1.1 32.75,5.75 v29,9.5
  Bottom 0.305: v14.75,35 19.35,35 22.6,38.25
  Bottom 0.508: v28.75,38.25 28.75,23.01 v28.37,22.63 | v14.5,46.35 22.6,38.25 v28.75,38.25 | v36.25,65.5 34.25,65.5 30,61.25 v27.5,61.25 | v27.5,49.75 28.75,48.5 v28.75,38.25
VDD5V  (via drill 0.35, 0.35 pad 0.4)  (2 unrouted)
  Top 0.2: C2.2 19.4,19.75 C4.2 19.6,20.2 U4.3 | D2.C 17.58,14.08 16.5,13 v16.5,12.25 | v11.25,1.39 10.69,1.96 R2.2
  Top 0.305: v20.71,17.35 20.71,17.44 C2.2 C4.2 | U4.3 19.6,19.95 19.4,19.75
  Top 0.508: SN74HCT245DWR.1 48,6.54 48.75,7.29 48.75,8.5 50.25,10 | 50.25,10 C24.1 51.8,11.89 C25.1 | 50.25,20.45 C5.1 | C5.1 46.72,20.5 SN74HCT245DWR1.1 | C5.1 50.3,22.05 52.59,24.34 C9.1 | 50.25,10 50.3,10.05 C5.1 | C5.1 49.05,19.25 44.3,19.25 43.25,20.3 43.25,29.75 39.22,33.78 34.28,33.78 | 34.28,33.78 C3.1 33.78,34.97 31.38,34.97 5V_TO_3V3_REGULATOR.3 | 34.28,33.78 33.28,33.78 33.28,32.78 28.53,32.78 26.41,30.66 U$9.P$13 U$9.P$14 26.56,28.5 v24.75,28.5 | v20.71,17.35 20.71,14.63 20.17,14.08 D2.C
  Bottom 0.2: v16.5,12.25 16.5,10.25 18,8.75 18,2.62 16.5,1.12 11.53,1.12 v11.25,1.39
  Bottom 0.508: v24.75,28.5 24.71,28.46 24.71,21.35 v20.71,17.35
VDD5VUSB  (via drill 0.35 pad 0.4)
  Top 0.305: J2.B9 7.69,15.44 7.94,15.69 J2.A4 v10.25,15.69 | J2.B4 7.6,12.94 7.85,12.69 J2.A9 | 9.06,12.69 J2.A9 | v10,5.25 U2.8 | J2.A9 v10.27,12.69 v10.28,12.7 | v12.5,12.7 13.01,12.19 D1.2
  Top 0.508: D2.A 13.88,14.08 v13.86,14.1 12.27,15.69 v10.25,15.69
  Bottom 0.305: 13.86,14.06 v13.86,14.1
  Bottom 0.508: 13.86,14.06 v12.5,12.7 v10.28,12.7 | v10.28,12.7 10.25,12.73 v10.25,15.69 | v10.28,12.7 10.28,5.53 v10,5.25